# EAGLE board PCB (EAGLE 9.3.0)
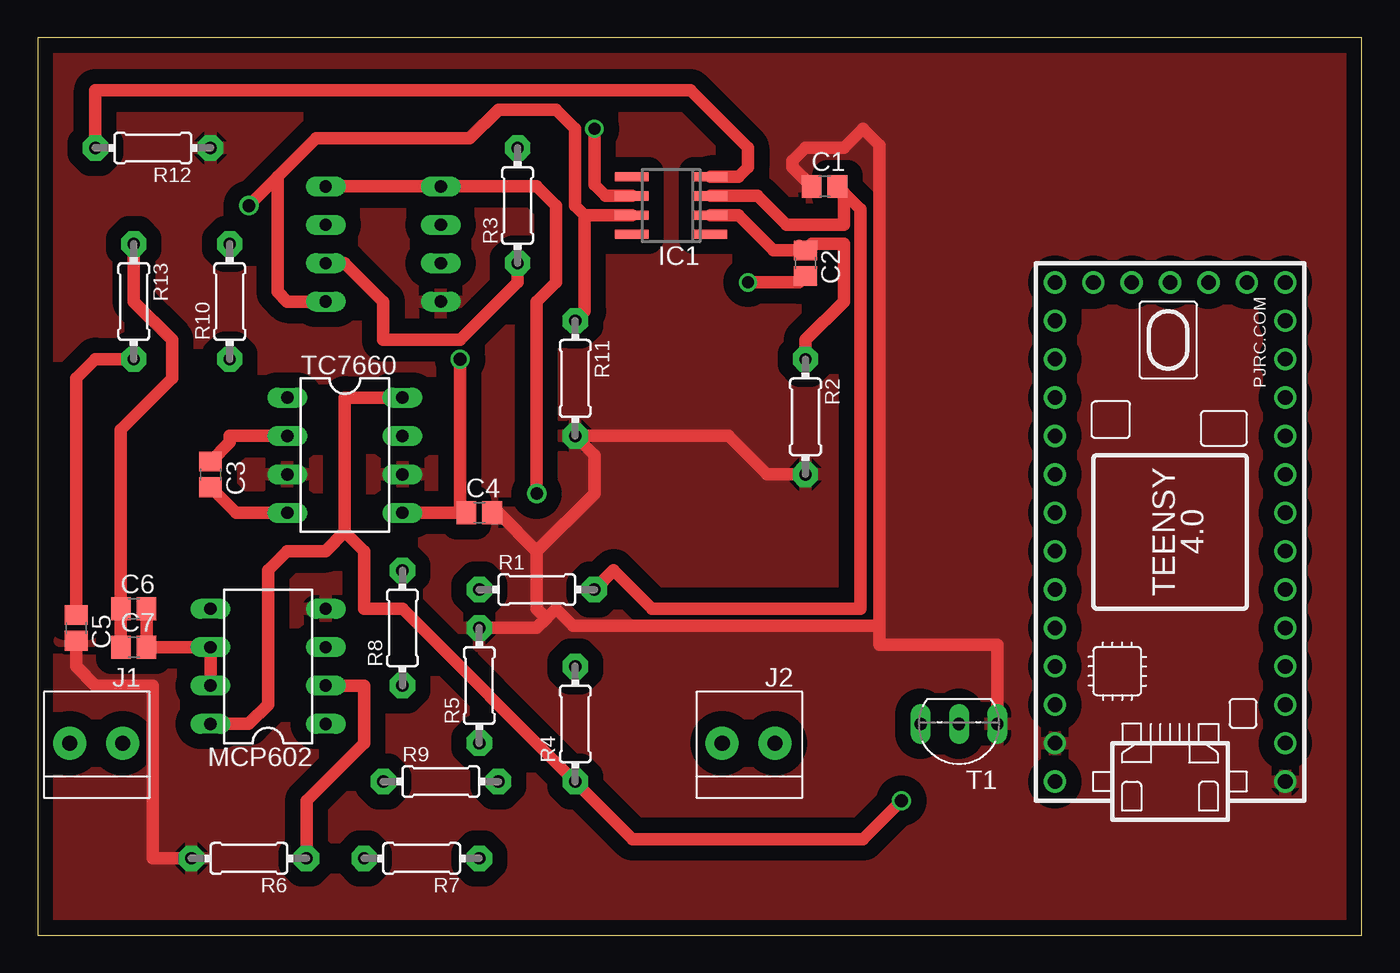
[diagram p0: board, top side]
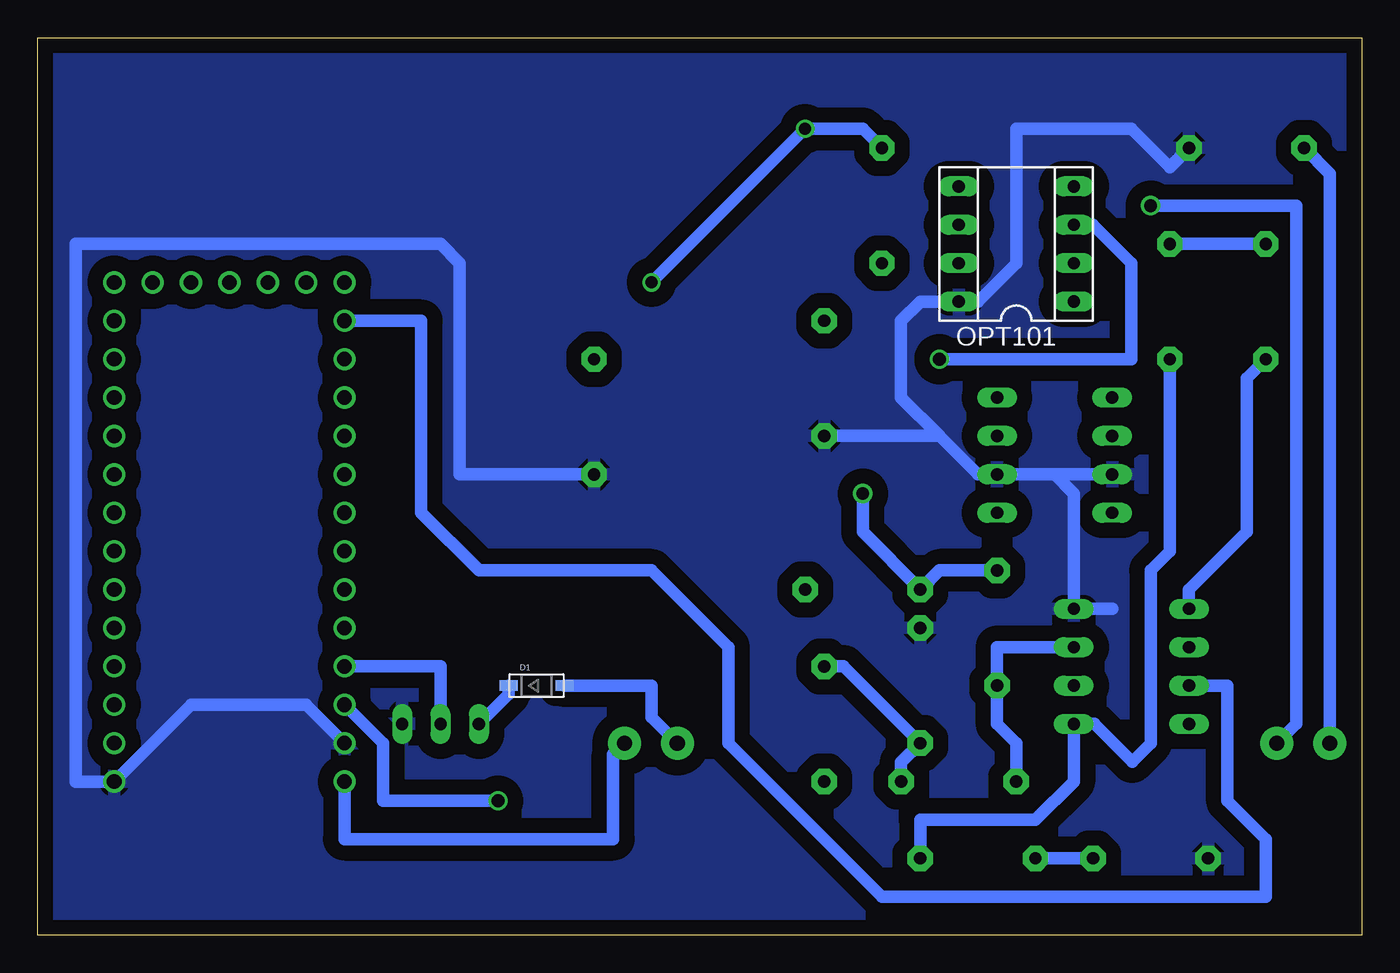
[diagram p1: board, bottom side, seen from below]

Size 87.61 x 59.36 mm. Coordinates in mm from the lower left corner, seen from the top.
Outline: 0,0 87.61,0 87.61,59.36 0,59.36 0,0
Copper layers (1*16): Top 0.035mm / dielectric 1.5mm / Bottom 0.035mm
Design rules "default": minimum track width 6mil, minimum drill 0.35mm, track to track 6mil, track to pad 6mil, pad to pad 6mil, via to via 6mil, smd to smd 6mil, copper to edge 40mil, drill to drill 6mil, minimum pad ring 10mil, minimum via ring 8mil, stop-mask expansion 4mil, vias tented up to drill 0mil, thermal gap 10mil

## Footprints (pad centres in the part's own frame; a part is rotated, then mirrored left to right if it is on the bottom)
C0805 = smd 1.3 x 1.5: 1 -0.85,0; 2 0.85,0
SOD-123 = smd 1.2 x 0.7: A 1.85,0; C -1.85,0
SO08 = smd 0.6 x 2.2: 1 -1.905,-2.6; 2 -0.635,-2.6; 3 0.635,-2.6; 4 1.905,-2.6; 5 1.905,2.6; 6 0.635,2.6; 7 -0.635,2.6; 8 -1.905,2.6
1X2-3.5MM = drill 1 pad 2.184: 1 1.8,0; 2 -1.7,0
DIL08 = drill 0.813 long: 1 -3.81,-3.81; 2 -1.27,-3.81; 3 1.27,-3.81; 4 3.81,-3.81; 5 3.81,3.81; 6 1.27,3.81; 7 -1.27,3.81; 8 -3.81,3.81
SOCKET-08 = drill 0.813 long: 1 -3.81,-3.81; 2 -1.27,-3.81; 3 1.27,-3.81; 4 3.81,-3.81; 5 3.81,3.81; 6 1.27,3.81; 7 -1.27,3.81; 8 -3.81,3.81
0204/7 = drill 0.813 pad 1.676 octagon: 1 -3.81,0; 2 3.81,0
TO92-EBC-OVAL = drill 0.813 long: B 0,-1.27; C 2.54,-1.27; E -2.54,-1.27
TEENSY_4.0 = drill 0.965: 0/RX -13.97,-7.62; 1/TX -11.43,-7.62; 2 -8.89,-7.62; 3/CANTX -6.35,-7.62; 3V3_LN 16.51,-2.54; 3V3_LO -11.43,7.62; 4/CANRX -3.81,-7.62; 5 -1.27,-7.62; 6 1.27,-7.62; 7 3.81,-7.62; 8 6.35,-7.62; 9/CS 8.89,-7.62; 10/CS 11.43,-7.62; 11/MOSI 13.97,-7.62; 12/MISO 16.51,-7.62; 13/SCK 16.51,7.62; 14/A0 13.97,7.62; 15/A1 11.43,7.62; 16/A2 8.89,7.62; 17/A3 6.35,7.62; 18/A4/SDA 3.81,7.62; 19/A5/SCL 1.27,7.62; 20/A6 -1.27,7.62; 21/A7 -3.81,7.62; 22/A8 -6.35,7.62; 23/A9 -8.89,7.62; GND -16.51,-7.62; GND2 -13.97,7.62; GND3 16.51,0; ON/OFF 16.51,5.08; PROG 16.51,2.54; VBAT\ 16.51,-5.08; VIN -16.51,7.62

## Placement (x,y rotation side)
C1  0.1 µF  [C0805]  52.07,49.53 0 top
C2  0.1 µF  [C0805]  50.8,44.45 270 top
C3  10 µF  [C0805]  11.43,30.48 270 top
C4  10 µF  [C0805]  29.21,27.94 0 top
C5  0.1 nF  [C0805]  2.54,20.32 270 top
C6  0.1 nF  [C0805]  6.35,21.59 0 top
C7  0.1 nF  [C0805]  6.35,19.05 0 top
D1  [SOD-123]  54.61,16.51 0 bottom
IC1  OPA827  [SO08]  41.91,48.26 90 top
J1  1X2-3.5MM  [1X2-3.5MM]  3.81,12.7 0 top
J2  1X2-3.5MM  [1X2-3.5MM]  46.99,12.7 0 top
MCP602  [DIL08]  15.24,17.78 90 top
OPT101  [SOCKET-08]  22.86,45.72 90 bottom
R1  1M  [0204/7]  33.02,22.86 0 top
R2  1M  [0204/7]  50.8,34.29 270 top
R3  100k  [0204/7]  31.75,48.26 90 top
R4  10K  [0204/7]  35.56,13.97 90 top
R5  10K  [0204/7]  29.21,16.51 90 top
R6  100K  [0204/7]  13.97,5.08 180 top
R7  100K  [0204/7]  25.4,5.08 180 top
R8  100K  [0204/7]  24.13,20.32 90 top
R9  100K  [0204/7]  26.67,10.16 0 top
R10  12K  [0204/7]  12.7,41.91 90 top
R11  3K3  [0204/7]  35.56,36.83 270 top
R12  3K3  [0204/7]  7.62,52.07 180 top
R13  12k  [0204/7]  6.35,41.91 270 top
T1  2N2222  [TO92-EBC-OVAL]  60.96,12.7 180 top
TC7660  [DIL08]  20.32,31.75 270 top
U$1  TEENSY_4.0  [TEENSY_4.0]  74.93,26.67 90 top

## Library data of the parts
C1-C7 D1 J1 J2 R1-R13 T1 = adafruit
IC1 = linear
MCP602 OPT101 TC7660 = ic-package
U$1 = TEENSY 4.0

## Nets
1_6V: R4.2 R5.1 R9.2
3_3VIN: MCP602.8 R4.1 TC7660.8 U$1.3V3_LO
5VUSB: J2.1 U$1.VIN
12V: IC1.7 J1.1 OPT101.1 R11.1
-3(NEGATIVE): C4.1 OPT101.3 TC7660.5
BEFOREFILTER: MCP602.1 R7.1 R10.1
FILTERPLUS: C5.1 MCP602.5 R13.2
LEDBASE: T1.B U$1.23/A9
N$1: C2.2 IC1.6 R3.2
N$2: OPT101.2 R3.1
N$3: C2.1 IC1.2 R2.1
N$4: C1.2 IC1.3 R1.2
N$5: C3.1 TC7660.2
N$6: C3.2 TC7660.4
N$7: MCP602.2 R6.1 R7.2
N$8: MCP602.3 R8.1 R9.1
N$9: D1.C T1.C
N$10: D1.A J2.2
N$11: C6.1 C7.1 R10.2 R13.1
NEGATIVE: IC1.4 J1.2 R12.2
OPTFILTERED: OPT101.4 OPT101.5 R1.1 R8.2
TOADC: C6.2 C7.2 MCP602.6 MCP602.7 U$1.14/A0
VGND: C1.1 C4.2 C5.2 MCP602.4 OPT101.8 R2.2 R5.2 R6.2 R11.2 R12.1 T1.E TC7660.3 TC7660.6 U$1.GND U$1.GND2

## Tracks (layer width: path | path; a pad name or v marks a point on that pad's centre or on a via)
1_6V
  Bottom 0.813: R4.2 34.29,17.78 R5.1 30.48,11.43 R9.2
3_3VIN  (via drill 0.85)
  Top 0.813: MCP602.8 13.97,13.97 15.24,15.24 15.24,24.13 16.51,25.4 19.05,25.4 20.32,26.67 | 20.32,26.67 20.32,35.56 TC7660.8 | v57.15,8.89 54.61,6.35 39.37,6.35 R4.1 24.13,21.59 21.59,21.59 21.59,25.4 20.32,26.67
  Bottom 0.813: U$1.3V3_LO 64.77,12.7 64.77,8.89 v57.15,8.89
5VUSB
  Bottom 0.813: U$1.VIN 67.31,6.35 49.53,6.35 49.53,11.96 J2.1
12V  (via drill 0.85)
  Top 0.813: 36.2,47.62 35.56,48.26 35.56,53.34 34.29,54.61 30.48,54.61 28.57,52.7 18.41,52.7 15.88,50.16 | IC1.7 36.2,47.62 | R11.1 36.2,41.27 36.2,47.62 | 15.88,50.16 v13.97,48.26 | 15.88,50.16 15.88,42.55 16.51,41.91 OPT101.1
  Bottom 0.813: v13.97,48.26 4.34,48.26 4.34,13.97 J1.1
-3(NEGATIVE)  (via drill 0.85)
  Top 0.813: TC7660.5 C4.1 27.94,28.36 v27.94,38.1
  Bottom 0.813: v27.94,38.1 15.24,38.1 15.24,44.45 17.78,46.99 OPT101.3
BEFOREFILTER
  Bottom 0.813: R7.1 29.21,7.62 21.59,7.62 19.05,10.16 MCP602.1 17.69,13.97 15.19,11.48 13.97,12.7 13.97,24.13 12.7,25.4 R10.1
FILTERPLUS
  Top 0.813: C5.1 2.54,36.83 3.81,38.1 R13.2
  Bottom 0.813: MCP602.5 11.43,22.86 7.62,26.67 7.62,36.83 R13.2
LEDBASE
  Bottom 0.813: T1.B 60.96,17.78 U$1.23/A9
N$1  (via drill 0.8)
  Top 0.813: C2.2 50.38,43.18 v46.99,43.18 | IC1.6 37.56,48.89 36.83,49.62 v36.83,53.34
  Bottom 0.813: R3.2 33.02,53.34 v36.83,53.34 v46.99,43.18
N$2
  Top 0.813: OPT101.2 20.32,44.45 22.86,41.91 22.86,39.37 27.94,39.37 31.75,43.18 R3.1
N$3
  Top 0.61: C2.1 50.38,45.72
  Top 0.813: R2.1 50.8,39.37 53.34,41.91 53.34,45.72 51.22,45.72 C2.1 48.68,45.3 46.36,47.62 IC1.2
N$4
  Top 0.813: 53.34,49.11 53.34,46.99 49.53,46.99 47.62,48.89 IC1.3 | 53.34,49.11 53.13,49.32 C1.2 | R1.2 38.1,24.13 40.64,21.59 54.44,21.59 54.44,48.01 53.34,49.11
N$5
  Top 0.813: C3.1 12.7,32.6 12.7,33.02 TC7660.2
N$6
  Top 0.813: C3.2 13.12,27.94 TC7660.4
N$7
  Top 0.813: R6.1 17.78,8.89 21.59,12.7 21.59,16.51 MCP602.2
  Bottom 0.813: R6.1 R7.2
N$8
  Bottom 0.813: R9.1 22.86,12.7 24.13,13.97 R8.1 24.13,19.05 MCP602.3
N$9
  Bottom 0.813: T1.C 56.46,15.93 D1.C
N$10
  Bottom 0.813: J2.2 46.99,14.4 46.99,16.51 D1.A
N$11
  Top 0.813: C7.1 C6.1 5.5,33.44 8.89,36.83 8.89,39.37 6.35,41.91 R13.1
  Bottom 0.813: R13.1 R10.2
NEGATIVE
  Top 0.813: R12.2 3.81,55.88 43.18,55.88 46.99,52.07 46.99,50.8 46.36,50.16 IC1.4
  Bottom 0.813: R12.2 2.11,50.37 J1.2
OPTFILTERED  (via drill 0.85)
  Top 0.813: v33.02,29.21 33.02,41.91 34.29,43.18 34.29,48.26 33.02,49.53 OPT101.5 OPT101.4
  Bottom 0.813: v33.02,29.21 33.02,26.67 R1.1 27.94,24.13 R8.2
TOADC
  Top 0.813: C6.2 C7.2 MCP602.6 MCP602.7
  Bottom 0.813: U$1.14/A0 62.23,40.64 62.23,27.94 58.42,24.13 46.99,24.13 41.91,19.05 41.91,12.7 31.75,2.54 6.35,2.54 6.35,6.35 8.89,8.89 8.89,16.51 MCP602.7
VGND
  Top 0.813: C4.2 30.48,27.94 33.02,25.4 | 50.59,50.16 C1.1 49.95,50.8 49.95,51.22 50.8,52.07 53.34,52.07 54.61,53.34 55.71,52.24 55.71,20.47 | 33.02,25.4 33.02,21.59 33.66,20.96 | 55.71,20.47 35.41,20.47 34.29,21.59 33.66,20.96 | 55.71,20.47 55.71,19.2 63.5,19.2 T1.E | 33.02,25.4 36.83,29.21 36.83,31.75 R11.2 45.72,33.02 48.26,30.48 R2.2 | R5.2 33.02,20.32 33.66,20.96 | C5.2 2.54,17.78 3.81,16.51 7.62,16.51 7.62,5.08 R6.2
  Bottom 0.813: R12.1 12.7,50.8 15.24,53.34 22.86,53.34 22.86,44.45 25.4,41.91 OPT101.8 29.21,41.91 30.48,40.64 30.48,35.56 27.94,33.02 | 20.32,30.48 TC7660.6 25.4,30.48 27.94,33.02 | 20.32,30.48 TC7660.3 | R11.2 27.94,33.02 | 20.32,30.48 19.05,29.21 MCP602.4 16.51,21.59 | U$1.GND2 69.85,15.24 77.47,15.24 U$1.GND 85.09,10.16 85.09,45.72 60.96,45.72 59.69,44.45 59.69,30.48 R2.2
  pour Bottom (isolate 1.016): 0,59.69 0,0 87.63,0 87.63,59.69
  pour Top (isolate 1.016): 0,59.69 0,0 87.63,0 87.63,59.69